# EAGLE board RFModule900 (EAGLE 7.2.0)

Size 100 x 80 mm. Coordinates in mm from the lower left corner, seen from the top.
Outline: 0,0 100,0 100,80 0,80 0,0
Copper layers (1*16): Top 0.035mm / dielectric 1.5mm / Bottom 0.035mm
Design rules "default": minimum track width 10mil, minimum drill 24mil, track to track 8mil, track to pad 8mil, pad to pad 8mil, via to via 8mil, smd to smd 8mil, copper to edge 40mil, drill to drill 8mil, minimum pad ring 10mil, minimum via ring 8mil, stop-mask expansion 4mil, vias tented up to drill 0mil, thermal gap 10mil

## Footprints (pad centres in the part's own frame; a part is rotated, then mirrored left to right if it is on the bottom)
0402-CAP = smd 0.85 x 0.9: 1 -0.58,0; 2 0.58,0
EIA3216 = smd 1.4 x 1.6: A 1.4,0; C -1.4,0
LED-0603 = smd 1 x 1: A 0,-0.877; C 0,0.877
2X10_LOCK_SPECIAL = drill 1.016 pad 1.88 octagon: 1 -11.43,-1.422; 2 -11.43,1.676; 3 -8.89,-1.676; 4 -8.89,1.422; 5 -6.35,-1.422; 6 -6.35,1.676; 7 -3.81,-1.676; 8 -3.81,1.422; 9 -1.27,-1.422; 10 -1.27,1.676; 11 1.27,-1.676; 12 1.27,1.422; 13 3.81,-1.422; 14 3.81,1.676; 15 6.35,-1.676; 16 6.35,1.422; 17 8.89,-1.422; 18 8.89,1.676; 19 11.43,-1.676; 20 11.43,1.422
AVR_ICSP = drill 1.016 pad 1.88 octagon: 1 -1.27,5.08; 2 1.27,5.08; 3 -1.27,2.54; 4 1.27,2.54; 5 -1.27,0; 6 1.27,0; 7 -1.27,-2.54; 8 1.27,-2.54; 9 -1.27,-5.08; 10 1.27,-5.08
C0402 = smd 0.7 x 0.9: 1 -0.65,0; 2 0.65,0
0402 = smd 0.7 x 0.9: 1 -0.65,0; 2 0.65,0
0402-RES = smd 0.85 x 0.9: 1 -0.58,0; 2 0.58,0
PAD-JUMPER-3-2OF3_NC_BY_TRACE_YES_SILK_FULL_BOX = smd 0.635 x 1.27: 1 -0.813,0; 2 0,0; 3 0.813,0
10-VFDFN = smd 2.4 x 1.65: GNDPAD 0,0 | smd 0.28 x 0.85: P$1 -1,1.475; P$2 -0.5,1.475; P$3 0,1.475; P$4 0.5,1.475; P$5 1,1.475; P$6 1,-1.475; P$7 0.5,-1.475; P$8 0,-1.475; P$9 -0.5,-1.475; P$10 -1,-1.475
20-VFQFN = smd 2.6 x 2.6: GND_PAD 0,0 | smd 0.7 x 0.25: P$1 -1.975,1; P$2 -1.975,0.5; P$3 -1.975,0; P$4 -1.975,-0.5; P$5 -1.975,-1; P$11 1.975,-1; P$12 1.975,-0.5; P$13 1.975,0; P$14 1.975,0.5; P$15 1.975,1 | smd 0.25 x 0.7: P$6 -1,-1.975; P$7 -0.5,-1.975; P$8 0,-1.975; P$9 0.5,-1.975; P$10 1,-1.975; P$16 1,1.975; P$17 0.5,1.975; P$18 0,1.975; P$19 -0.5,1.975; P$20 -1,1.975
24-VFQFN = smd 0.528 x 0.26: P$1 -1.864,1.25; P$2 -1.864,0.75; P$3 -1.864,0.25; P$4 -1.864,-0.25; P$5 -1.864,-0.75; P$6 -1.864,-1.25; P$13 1.864,-1.25; P$14 1.864,-0.75; P$15 1.864,-0.25; P$16 1.864,0.25; P$17 1.864,0.75; P$18 1.864,1.25 | smd 0.26 x 0.528: P$7 -1.25,-1.864; P$8 -0.75,-1.864; P$9 -0.25,-1.864; P$10 0.25,-1.864; P$11 0.75,-1.864; P$12 1.25,-1.864; P$19 1.25,1.864; P$20 0.75,1.864; P$21 0.25,1.864; P$22 -0.25,1.864; P$23 -0.75,1.864; P$24 -1.25,1.864 | smd 2.7 x 2.7: P$GND_PAD 0,0
16-QFN = smd 0.75 x 0.3: P$1 -1.5,0.75; P$2 -1.5,0.25; P$3 -1.5,-0.25; P$4 -1.5,-0.75; P$9 1.5,-0.75; P$10 1.5,-0.25; P$11 1.5,0.25; P$12 1.5,0.75 | smd 0.3 x 0.75: P$5 -0.75,-1.5; P$6 -0.25,-1.5; P$7 0.25,-1.5; P$8 0.75,-1.5; P$13 0.75,1.5; P$14 0.25,1.5; P$15 -0.25,1.5; P$16 -0.75,1.5 | smd 1.75 x 1.75: P$GNDPAD 0,0
SOT23-5 = smd 1.2 x 0.55: 1 -1.3,0.95; 2 -1.3,0; 3 -1.3,-0.95; 4 1.3,-0.95; 5 1.3,0.95
TSOP-6 = smd 0.7 x 1: 1 -0.99,-1.2; 2 0,-1.2; 3 0.99,-1.2; 4 0.99,1.2; 5 0,1.2; 6 -0.99,1.2
SMA90_DIP = drill 1.5 pad 2.54: ANTENNA 0,0 | drill 1.6 pad 2.54: GND1 -2.54,2.54; GND2 2.54,2.54; GND3 -2.54,-2.54; GND4 2.54,-2.54
4-SMD_3.2_X_2.5 = smd 1.4 x 1.2: P$1 -1.1,-0.85; P$2 1.1,-0.85; P$3 1.1,0.85; P$4 -1.1,0.85

## Placement (x,y rotation side)
C1  2.7pF  [0402-CAP]  -25.4,33.02 0 top  (outside the outline)
C2  1uF  [0402-CAP]  -29.21,33.02 0 top  (outside the outline)
C3  15pF  [0402-CAP]  -33.02,33.02 0 top  (outside the outline)
C4  12pF  [0402-CAP]  -36.83,33.02 0 top  (outside the outline)
C5  10pF  [0402-CAP]  -40.64,33.02 0 top  (outside the outline)
C6  5.6pF  [0402-CAP]  -44.45,33.02 0 top  (outside the outline)
C7  0.5pF  [0402-CAP]  -48.26,33.02 0 top  (outside the outline)
C8  22pF  [0402-CAP]  -15.24,36.83 0 top  (outside the outline)
C9  27pF  [0402-CAP]  -19.05,36.83 0 top  (outside the outline)
C10  2.2uF  [0402-CAP]  -22.86,36.83 0 top  (outside the outline)
C11  10uF  [0402-CAP]  -26.67,36.83 0 top  (outside the outline)
C12  1uF  [0402-CAP]  -30.48,36.83 0 top  (outside the outline)
C13  2.2uF  [0402-CAP]  -34.29,36.83 0 top  (outside the outline)
C14  220pF  [0402-CAP]  -38.1,36.83 0 top  (outside the outline)
C15  10uF  [0402-CAP]  -41.91,36.83 0 top  (outside the outline)
C16  1uF  [0402-CAP]  -45.72,36.83 0 top  (outside the outline)
C17  10uF  [0402-CAP]  -49.53,36.83 0 top  (outside the outline)
C18  1uF  [0402-CAP]  -15.24,40.64 0 top  (outside the outline)
C19  22pF  [0402-CAP]  -19.05,40.64 0 top  (outside the outline)
C20  1uF  [0402-CAP]  -22.86,40.64 0 top  (outside the outline)
C21  1pF  [0402-CAP]  -26.67,40.64 0 top  (outside the outline)
C22  3pF  [0402-CAP]  -30.48,40.64 0 top  (outside the outline)
C23  3pF  [0402-CAP]  -34.29,40.64 0 top  (outside the outline)
C24  4.3pF  [0402-CAP]  -38.1,40.64 0 top  (outside the outline)
C25  4.3pF  [0402-CAP]  -41.91,40.64 0 top  (outside the outline)
C26  56pF  [0402-CAP]  -45.72,40.64 0 top  (outside the outline)
C27  56pF  [0402-CAP]  -49.53,40.64 0 top  (outside the outline)
C28  56pF  [0402-CAP]  -15.24,44.45 0 top  (outside the outline)
C29  3.9pF  [0402-CAP]  -19.05,44.45 0 top  (outside the outline)
C30  5.6pF  [0402-CAP]  -22.86,44.45 0 top  (outside the outline)
C31  22pF  [0402-CAP]  -26.67,44.45 0 top  (outside the outline)
C32  1uF  [EIA3216]  -40.64,25.4 0 top  (outside the outline)
C34  33pF  [0402-CAP]  -30.48,44.45 0 top  (outside the outline)
C35  100pF  [0402-CAP]  -34.29,44.45 0 top  (outside the outline)
C36  100nF  [0402-CAP]  -38.1,44.45 0 top  (outside the outline)
C37  2.2uF  [0402-CAP]  -41.91,44.45 0 top  (outside the outline)
D1  [LED-0603]  -49.53,25.4 0 top  (outside the outline)
D2  [LED-0603]  -13.97,33.02 0 top  (outside the outline)
D3  [LED-0603]  -16.51,33.02 0 top  (outside the outline)
D4  [LED-0603]  -19.05,33.02 0 top  (outside the outline)
D5  [LED-0603]  -21.59,33.02 0 top  (outside the outline)
JP1  [2X10_LOCK_SPECIAL]  2.54,12.7 90 top
JP2  [AVR_ICSP]  6.35,22.86 90 top
JP3  [AVR_ICSP]  6.35,2.54 270 top
L1  10nH  [C0402]  -45.72,44.45 0 top  (outside the outline)
L2  1.5nH  [C0402]  -49.53,44.45 0 top  (outside the outline)
L3  5.6nH  [C0402]  -15.24,48.26 0 top  (outside the outline)
L4  [0402]  -25.4,26.67 0 top  (outside the outline)
L5  [0402]  -29.21,26.67 0 top  (outside the outline)
L6  18nH  [C0402]  -19.05,48.26 0 top  (outside the outline)
L7  22nH  [C0402]  -22.86,48.26 0 top  (outside the outline)
L8  8.2nH  [C0402]  -26.67,48.26 0 top  (outside the outline)
L9  100nH  [C0402]  -30.48,48.26 0 top  (outside the outline)
L10  12nH  [C0402]  -34.29,48.26 0 top  (outside the outline)
L11  10nH  [C0402]  -38.1,48.26 0 top  (outside the outline)
R1  220  [0402-RES]  -41.91,48.26 0 top  (outside the outline)
R2  220  [0402-RES]  -45.72,48.26 0 top  (outside the outline)
R3  390  [0402-RES]  -49.53,48.26 0 top  (outside the outline)
R4  390  [0402-RES]  -15.24,52.07 0 top  (outside the outline)
R5  5k  [0402-RES]  -19.05,52.07 0 top  (outside the outline)
R6  5k  [0402-RES]  -22.86,52.07 0 top  (outside the outline)
R7  5k  [0402-RES]  -26.67,52.07 0 top  (outside the outline)
R8  5k  [0402-RES]  -30.48,52.07 0 top  (outside the outline)
R9  5k  [0402-RES]  -34.29,52.07 0 top  (outside the outline)
R10  5k  [0402-RES]  -38.1,52.07 0 top  (outside the outline)
R11  5k  [0402-RES]  -41.91,52.07 0 top  (outside the outline)
R12  5k  [0402-RES]  -45.72,52.07 0 top  (outside the outline)
R13  10k  [0402-RES]  -49.53,52.07 0 top  (outside the outline)
R14  5k  [0402-RES]  -15.24,55.88 0 top  (outside the outline)
R15  5k  [0402-RES]  -19.05,55.88 0 top  (outside the outline)
SJ2  invert Control Signal  [PAD-JUMPER-3-2OF3_NC_BY_TRACE_YES_SILK_FULL_BOX]  -35.56,26.67 0 top  (outside the outline)
U1  TPS2561  [10-VFDFN]  20.32,22.86 0 top
U2  TPS2561  [10-VFDFN]  33.02,21.59 0 top
U$1  SI4463  [20-VFQFN]  20.32,13.97 0 top
U$2  RF6886  [24-VFQFN]  31.75,13.97 0 top
U$3  PE42423  [16-QFN]  49.53,12.7 0 top
U$4  LP3984  [SOT23-5]  -45.72,26.67 0 top  (outside the outline)
U$5  AO6602  [TSOP-6]  19.05,5.08 0 top
X1  [SMA90_DIP]  55.88,12.7 270 top
Y1  30 Mhz  [4-SMD_3.2_X_2.5]  16.51,20.32 0 top

## Library data of the parts
C1-C31 C34-C37 = SparkFun-Capacitors
C32 = SparkFun-Capacitors; DIGI: 399-3678-1-ND; MPN: T491A105K016AT; PROD_ID: CAP-00811
D1-D5 = SparkFun-LED
JP1-JP3 = SparkFun-Connectors
L1 L2 L6-L11 SJ2 = SparkFun-Passives
L3 = SparkFun-Passives; COILCRAFT: 1606
L4 L5 = inductors
R1-R15 = SparkFun-Resistors
U1 U2 U$1-U$4 = RitLaunchInitiative
U$5 = RitLaunchInitiative; DIGI: 785-1077-1-ND; MPN: AO6602L
X1 = adafruit
Y1 = RitLaunchInitiative; DIGI: 887-1330-1-ND; MPN: 7M-30.000MEEQ-T

## Nets
3.3V: C8.2 JP1.1 JP1.2 JP1.3 JP1.4 JP1.6 R5.1 SJ2.3 U1.P$2 U1.P$3 U2.P$2 U2.P$3 U$3.P$16 U$5.4
3V1: C32.A D3.A U$4.5
3V3_MAIN: R13.2
5V: JP1.9 U$4.1
GND: C1.1 C2.2 C3.1 C4.1 C5.1 C6.1 C7.1 C8.1 C9.2 C10.1 C11.2 C12.2 C13.1 C14.1 C15.2 C16.2 C17.2 C18.2 C19.1 C20.2 C22.1 C24.1 C25.1 C30.1 C31.1 C32.C C34.1 C35.1 C36.1 C37.1 JP1.5 JP1.7 JP1.8 JP1.10 JP1.12 R7.1 R8.1 R9.1 R10.1 R11.1 R12.1 R14.1 R15.2 SJ2.1 U1.GNDPAD U1.P$1 U2.GNDPAD U2.P$1 U$1.GND_PAD U$1.P$18 U$2.P$GND_PAD U$3.P$1 U$3.P$3 U$3.P$4 U$3.P$5 U$3.P$6 U$3.P$8 U$3.P$9 U$3.P$10 U$3.P$12 U$3.P$13 U$3.P$GNDPAD U$4.2 U$5.5 X1.GND1 X1.GND2 X1.GND3 X1.GND4 Y1.P$2 Y1.P$4
GPIO0: U$1.P$9
GPIO1: U$1.P$10
GPIO2: U$1.P$19
N$1: C1.2 L1.2 L11.1
N$2: C10.2 R1.2 U$2.P$19
N$3: C12.1 C17.1 R2.1
N$4: C16.1 R4.2 U$2.P$23
N$5: C6.2 C7.2 C27.2 L2.2
N$6: C9.1 L3.2 L4.1 L5.1
N$7: D3.C R11.2
N$8: C3.2 C4.2 C5.2 L2.1 L3.1 U$2.P$13 U$2.P$14 U$2.P$15 U$2.P$16 U$2.P$17 U$2.P$18
N$9: C13.2 R2.2 U$2.P$5
N$10: C24.2 C26.1 L8.1
N$11: R9.2 U1.P$7
N$12: C21.1 L6.1 U$1.P$2
N$13: C21.2 C23.2 L7.2
N$14: C23.1 C28.2
N$15: C25.2 L8.2 X1.ANTENNA
N$16: C26.2 U$3.P$7
N$17: L11.2 U$2.P$6
N$18: C18.1 R3.2 U$2.P$24
N$19: C2.1 C11.1 R1.1
N$20: C29.1 L9.2 U$1.P$4
N$21: C29.2 L10.1
N$22: C30.2 L1.1 L10.2
N$23: C27.1 U$3.P$2
N$24: C28.1 U$3.P$11
N$25: R6.1 SJ2.2
N$26: C19.2 R6.2 U$3.P$15
N$27: C22.2 L6.2 L7.1 U$1.P$3
N$28: U$1.P$17 Y1.P$1
N$29: U$1.P$16 Y1.P$3
N$30: D2.C R10.2
N$31: D1.C R12.2
N$32: R8.2 U2.P$7
N$33: D5.A R5.2
N$34: D5.C U$5.6
N$35: D4.A U$5.2
N$36: D4.C R15.1
N_IRQ: JP1.11 U$1.P$11
N_SEL: JP1.19 U$1.P$15
PA_3V3: C14.2 C15.1 C20.1 D2.A L4.2 L5.2 R3.1 R4.1 U2.P$8 U2.P$9 U$2.P$1 U$2.P$2 U$2.P$3 U$2.P$22
PA_ENABLE: JP1.20 U2.P$4 U2.P$5 U$4.3
PA_TEMP: JP1.14 R13.1 R14.2
RADIO_3V3: C34.2 C35.2 C36.2 C37.2 D1.A L9.1 U1.P$9 U$1.P$6 U$1.P$8
RADIO_ENABLE: JP1.18 R7.2 U1.P$4 U$1.P$1
SCLK: JP1.13 U$1.P$12
SDI: JP1.17 U$1.P$14
SDO: JP1.15 U$1.P$13
STATUS_LED: JP1.16
TR_SWITCH_CTL: C31.2 U$1.P$20 U$3.P$14 U$5.1 U$5.3

## Tracks (layer width: path | path; a pad name or v marks a point on that pad's centre or on a via)
3.3V  (13 unrouted)
3V1  (2 unrouted)
5V  (1 unrouted)
GND  (69 unrouted)
N$1  (2 unrouted)
N$2  (2 unrouted)
N$3  (2 unrouted)
N$4  (2 unrouted)
N$5  (3 unrouted)
N$6  (3 unrouted)
N$7  (1 unrouted)
N$8  (10 unrouted)
N$9  (2 unrouted)
N$10  (2 unrouted)
N$11  (1 unrouted)
N$12  (2 unrouted)
N$13  (2 unrouted)
N$14  (1 unrouted)
N$15  (2 unrouted)
N$16  (1 unrouted)
N$17  (1 unrouted)
N$18  (2 unrouted)
N$19  (2 unrouted)
N$20  (2 unrouted)
N$21  (1 unrouted)
N$22  (2 unrouted)
N$23  (1 unrouted)
N$24  (1 unrouted)
N$25  (1 unrouted)
N$26  (2 unrouted)
N$27  (3 unrouted)
N$28  (1 unrouted)
N$29  (1 unrouted)
N$30  (1 unrouted)
N$31  (1 unrouted)
N$32  (1 unrouted)
N$33  (1 unrouted)
N$34  (1 unrouted)
N$35  (1 unrouted)
N$36  (1 unrouted)
N_IRQ  (1 unrouted)
N_SEL  (1 unrouted)
PA_3V3  (13 unrouted)
PA_ENABLE  (3 unrouted)
PA_TEMP  (2 unrouted)
RADIO_3V3  (8 unrouted)
RADIO_ENABLE  (3 unrouted)
SCLK  (1 unrouted)
SDI  (1 unrouted)
SDO  (1 unrouted)
TR_SWITCH_CTL  (4 unrouted)